# EAGLE board rapidshark-main-breakout-top-mk-1.7 (EAGLE 6.5.0)
VERSION: v1.7
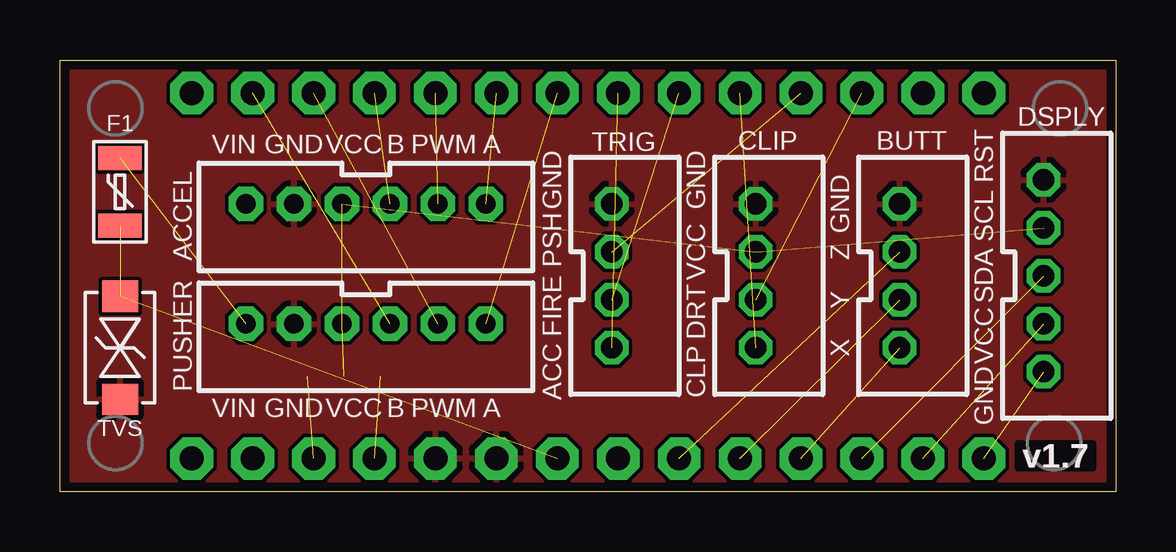
[diagram p0: board, top side]
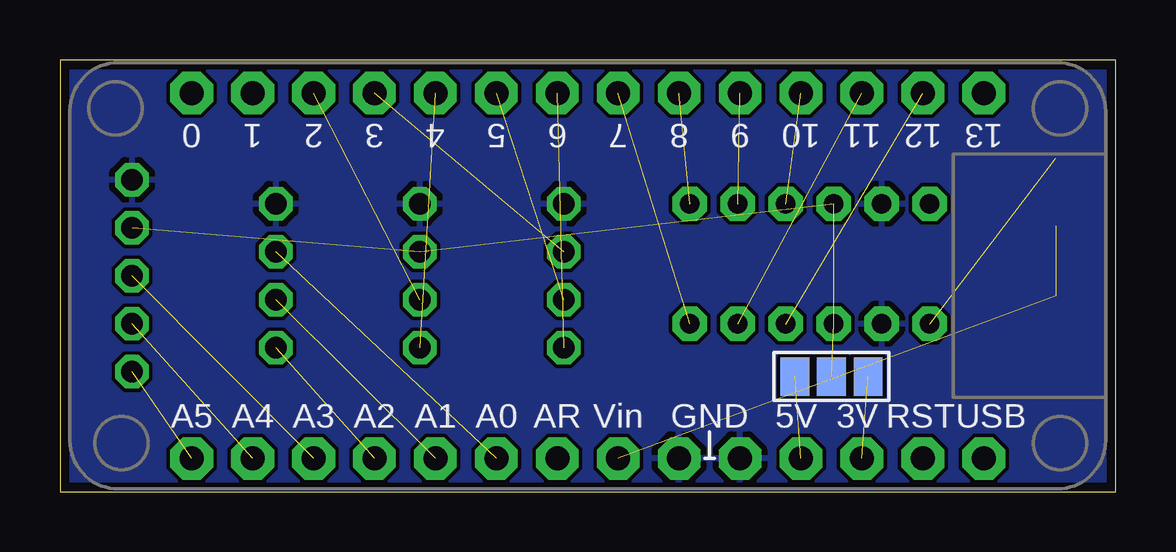
[diagram p1: board, bottom side, seen from below]

Size 44 x 18 mm. Coordinates in mm from the lower left corner, seen from the top.
Outline: 44,18 44,0 0,0 0,18 44,18
Copper layers (1*16): Top 0.0356mm / dielectric 1.5011mm / Bottom 0.0356mm
Design rules "LaenPCBOrder_2": minimum track width 6mil, minimum drill 13mil, track to track 6mil, track to pad 6mil, pad to pad 6mil, via to via 6mil, smd to smd 6mil, copper to edge 15mil, drill to drill 6mil, minimum pad ring 7mil, minimum via ring 7mil, stop-mask expansion 3mil, vias tented up to drill 20mil, thermal gap 10mil

## Footprints (pad centres in the part's own frame; a part is rotated, then mirrored left to right if it is on the bottom)
JST-6-PH-VERT-PTH = drill 0.8 pad 1.422 octagon: 1 -5,0; 2 -3,0; 3 -1,0; 4 1,0; 5 3,0; 6 5,0
JST-4-PH-VERT-PTH = drill 0.9 pad 1.4 octagon: 1 0,0; 2 2,0; 3 4,0; 4 6,0
JST-5-PH-VERT-PTH = drill 0.9 pad 1.4 octagon: 1 -4,0; 2 -2,0; 3 0,0; 4 2,0; 5 4,0
PTC-1206 = smd 1 x 1.8: 1 -1.4,0; 2 1.4,0
SMA-DIODE-TVS-BIDIR = smd 1.3 x 1.5: 1 -2.15,0; 2 2.15,0
ADAFRUIT_METRO_MINI_BACK = drill 1 pad 1.778 octagon: 1 16.51,7.62; 2 13.97,7.62; 3 11.43,7.62; 4 8.89,7.62; 5 6.35,7.62; 6 3.81,7.62; 7 1.27,7.62; 8 -1.27,7.62; 9 -3.81,7.62; 10 -6.35,7.62; 11 -8.89,7.62; 12 -11.43,7.62; 13 -13.97,7.62; 14 -16.51,7.62; 15 -16.51,-7.62; 16 -13.97,-7.62; 17 -11.43,-7.62; 18 -8.89,-7.62; 19 -6.35,-7.62; 20 -3.81,-7.62; 21 -1.27,-7.62; 22 1.27,-7.62; 23 3.81,-7.62; 24 6.35,-7.62; 25 8.89,-7.62; 26 11.43,-7.62; 27 13.97,-7.62; 28 16.51,-7.62
PAD-JUMPER-3-NO_YES_SILK_FULL_BOX = smd 1.2 x 1.6: 1 -1.524,0; 2 0,0; 3 1.524,0

## Placement (x,y rotation side)
ACCEL  M06JST-PH-PTH-VERT  [JST-6-PH-VERT-PTH]  12.75,12 180 top
BUTT  M04JST-PTH-VERT  [JST-4-PH-VERT-PTH]  35,12 270 top
CLIP  M04JST-PTH-VERT  [JST-4-PH-VERT-PTH]  29,12 270 top
DSPLY  M05JST-PH-VERT-PTH  [JST-5-PH-VERT-PTH]  41,9 270 top
F1  100mA  [PTC-1206]  2.5,12.5 90 top
FRAME1  FRAME-LETTERNO_PACKAGE  [DUMMY]  0,0 270 bottom
PUSHER  M06JST-PH-PTH-VERT  [JST-6-PH-VERT-PTH]  12.75,7 180 top
TRIG  M04JST-PTH-VERT  [JST-4-PH-VERT-PTH]  23,12 270 top
TVS  [SMA-DIODE-TVS-BIDIR]  2.5,6 90 top
U1  [ADAFRUIT_METRO_MINI_BACK]  22,9 0 top
VSEL  [PAD-JUMPER-3-NO_YES_SILK_FULL_BOX]  11.84,4.8 180 bottom

## Library data of the parts
ACCEL BUTT CLIP DSPLY PUSHER TRIG TVS U1 VSEL = A_butts
F1 = A_butts; PROD_ID: RES-11150
FRAME1 = A_butts; DESIGNER: sean@yak.net; VERSION: v1.5

## Nets
3.3V: U1.17 VSEL.1
5V: U1.18 VSEL.3
ACCEL: TRIG.4 U1.7
ACCEL_A: ACCEL.1 U1.9
ACCEL_B: ACCEL.3 U1.11
ACCEL_PWM: ACCEL.2 U1.10
CLIP: CLIP.4 U1.5
DART: CLIP.3 U1.3
DISP_RST: DSPLY.3 U1.26
FIRE: TRIG.3 U1.6
GND: ACCEL.5 BUTT.1 CLIP.1 DSPLY.1 PUSHER.5 TRIG.1 TVS.1 U1.19 U1.20
N$1: F1.1 TVS.2 U1.21
PUSH: TRIG.2 U1.4
PUSH_A: PUSHER.1 U1.8
PUSH_B: PUSHER.3 U1.13
PUSH_PWM: PUSHER.2 U1.12
SCL: DSPLY.5 U1.28
SDA: DSPLY.4 U1.27
VCC: ACCEL.4 CLIP.2 DSPLY.2 PUSHER.4 VSEL.2
VIN: F1.2 PUSHER.6
X: BUTT.4 U1.25
Y: BUTT.3 U1.24
Z: BUTT.2 U1.23

## Tracks (layer width: path | path; a pad name or v marks a point on that pad's centre or on a via)
3.3V  (1 unrouted)
5V  (1 unrouted)
ACCEL  (1 unrouted)
ACCEL_A  (1 unrouted)
ACCEL_B  (1 unrouted)
ACCEL_PWM  (1 unrouted)
CLIP  (1 unrouted)
DART  (1 unrouted)
DISP_RST  (1 unrouted)
FIRE  (1 unrouted)
GND
  pour Top (rank 6): 44,0 0,0 0,18 44,18
  pour Bottom (rank 6): 44,0 0,0 0,18 44,18
N$1  (2 unrouted)
PUSH  (1 unrouted)
PUSH_A  (1 unrouted)
PUSH_B  (1 unrouted)
PUSH_PWM  (1 unrouted)
SCL  (1 unrouted)
SDA  (1 unrouted)
VCC  (4 unrouted)
VIN  (1 unrouted)
X  (1 unrouted)
Y  (1 unrouted)
Z  (1 unrouted)

## Text on the board
tPlace: VIN | GND | VCC | B | PWM | A | RST | GND | GND | GND | SCL | PSH | VCC | Z | SDA | FIRE | DRT | Y | X | VCC | ACC | CLP | VIN | GND | VCC | B | PWM | A | GND
Reference: UP | BARREL | BUTT | DOWN